# EAGLE board tdr-bad (EAGLE 6.5.0)
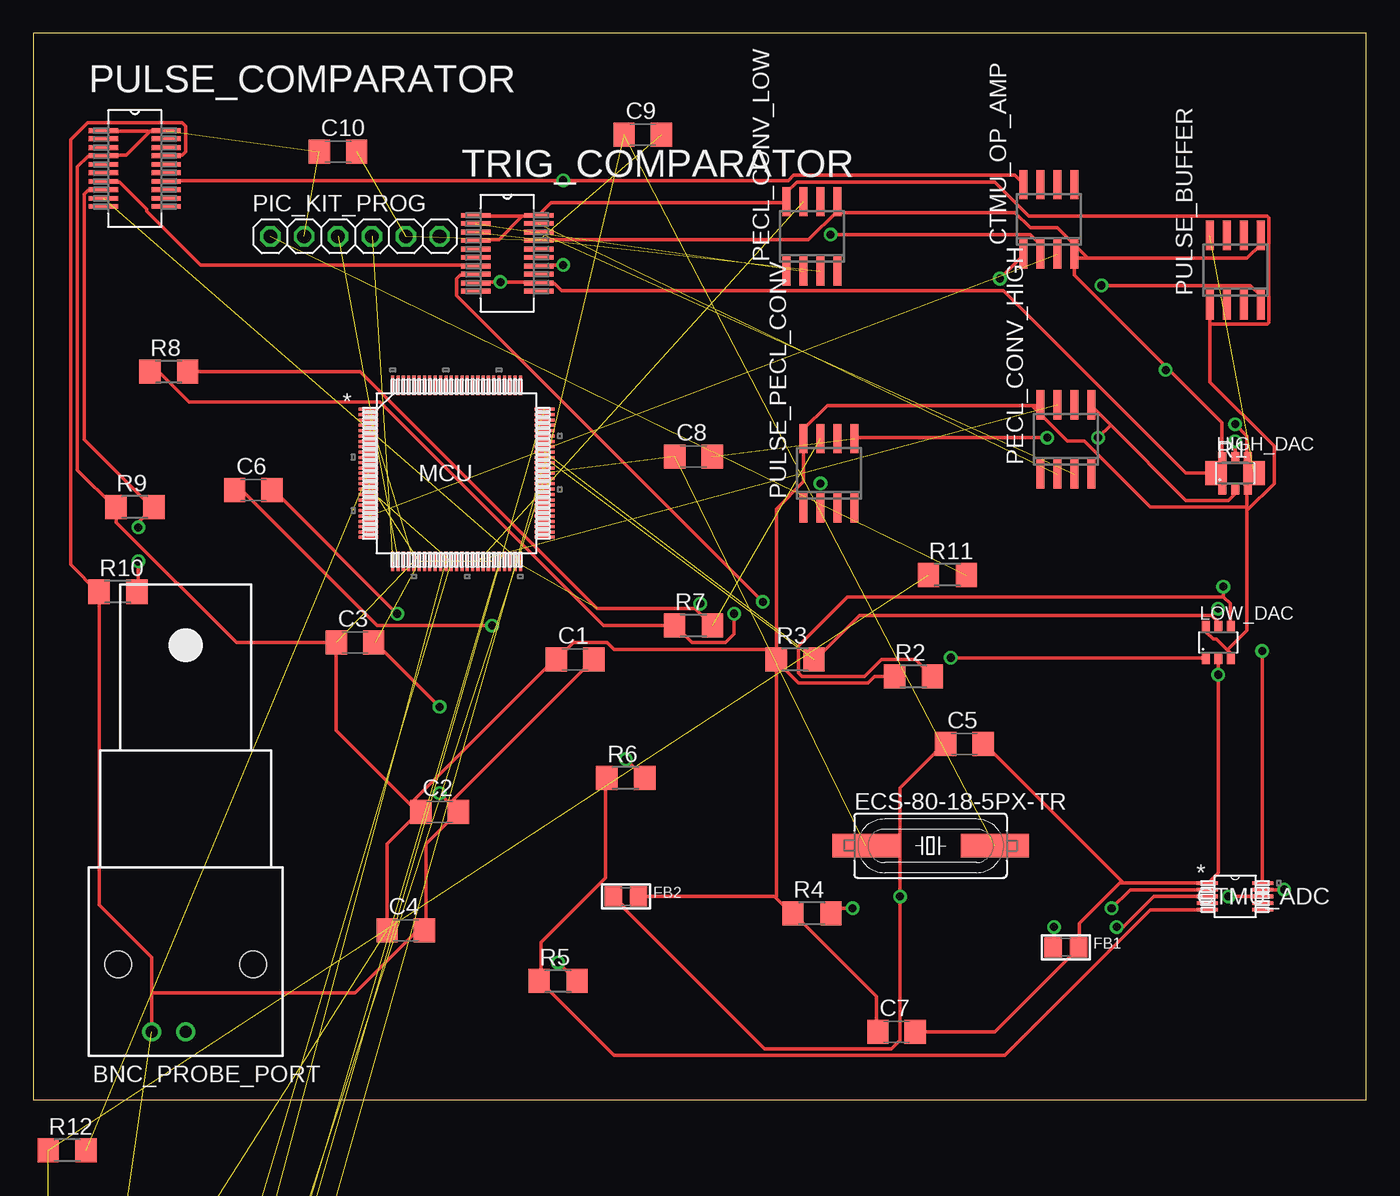
[diagram p0: board, top side]
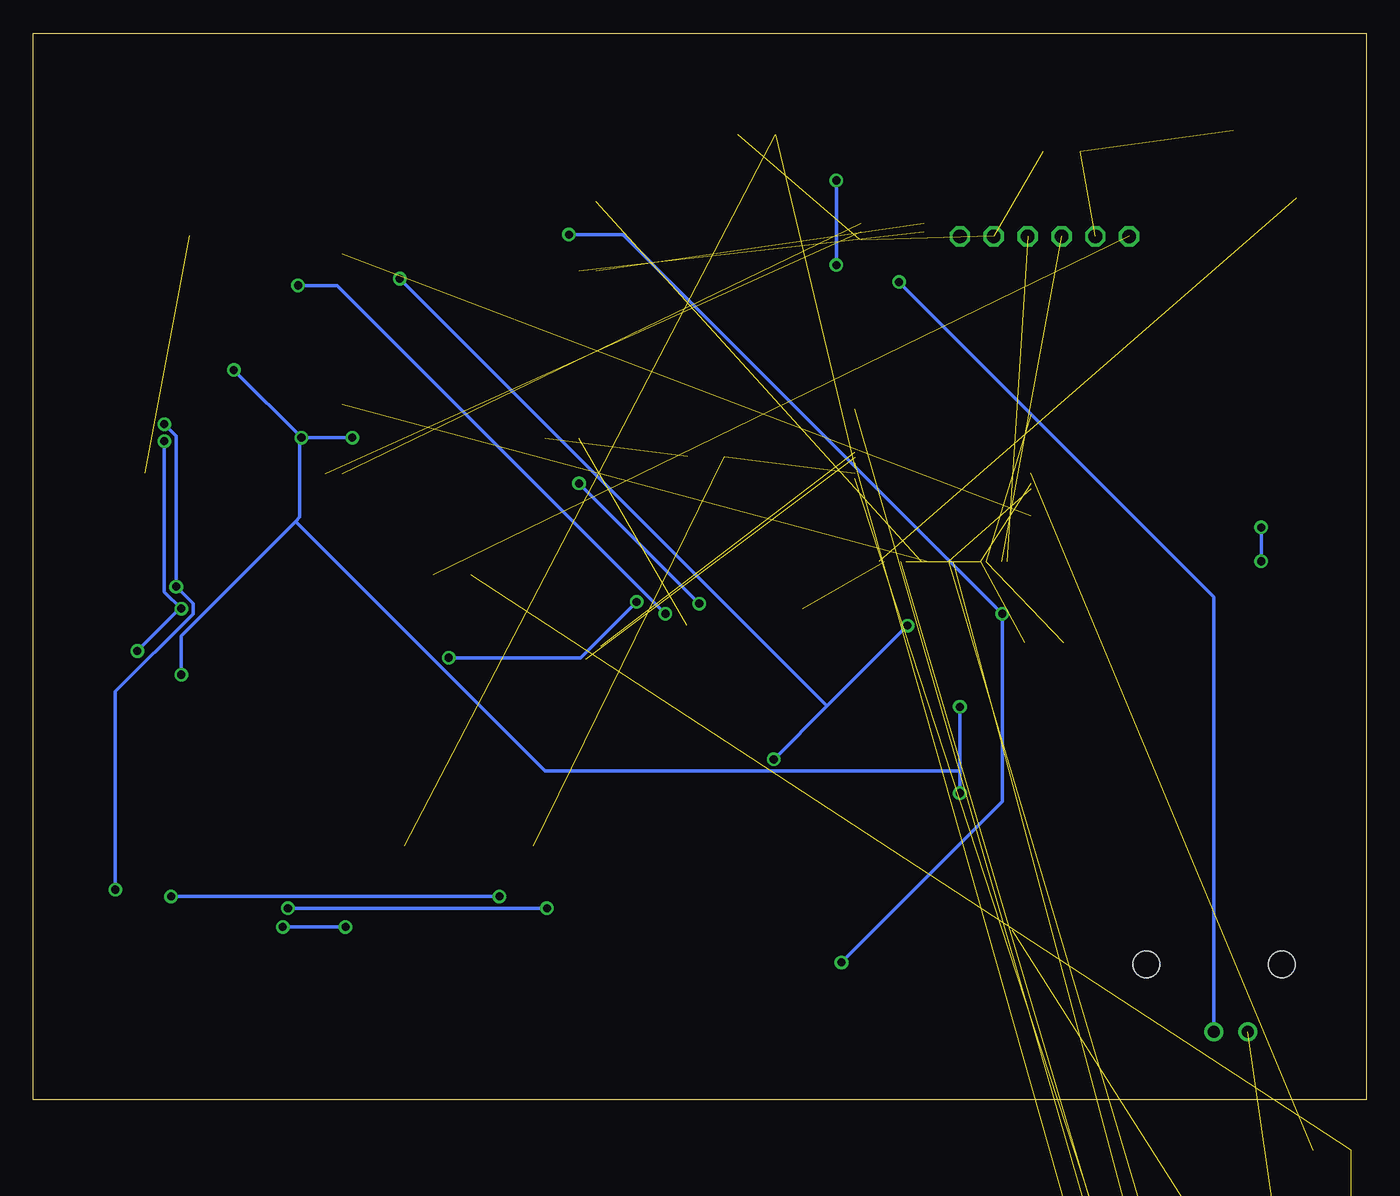
[diagram p1: board, bottom side, seen from below]

Size 100 x 80 mm. Coordinates in mm from the lower left corner, seen from the top.
Outline: 0,0 100,0 100,80 0,80 0,0
Copper layers (1*16): Top 0.035mm / dielectric 1.5mm / Bottom 0.035mm
Design rules "default": minimum track width 10mil, minimum drill 24mil, track to track 8mil, track to pad 8mil, pad to pad 8mil, via to via 8mil, smd to smd 8mil, copper to edge 40mil, drill to drill 8mil, minimum pad ring 10mil, minimum via ring 8mil, stop-mask expansion 4mil, vias tented up to drill 0mil, thermal gap 10mil

## Footprints (pad centres in the part's own frame; a part is rotated, then mirrored left to right if it is on the bottom)
AMP_227161 = drill 0.9 pad 1.27: 1 0,-5.08; 2 -2.54,-5.08 | hole 2: -5.08,0; 5.08,0
C1206 = smd 1.6 x 1.8: 1 -1.4,0; 2 1.4,0
DGS10 = smd 1.575 x 0.279: 1 -2.083,0.991; 2 -2.083,0.508; 3 -2.083,0; 4 -2.083,-0.508; 5 -2.083,-0.991; 6 2.083,-0.991; 7 2.083,-0.508; 8 2.083,0; 9 2.083,0.508; 10 2.083,0.991
SOIC8 = smd 0.6 x 2.2: 1 3.175,1.21; 2 4.445,1.21; 3 5.715,1.21; 4 6.985,1.21; 5 6.985,6.41; 6 5.715,6.41; 7 4.445,6.41; 8 3.175,6.41
SM49 = smd 5.08 x 1.778: 1 -4.826,0; 2 4.826,0
0805 = smd 1.3 x 1.5: 1 -0.95,0; 2 0.95,0
SOT-23-6 = smd 0.6 x 0.9: 1 -0.95,-1.15; 2 0,-1.15; 3 0.95,-1.15; 4 0.95,1.15; 5 0,1.15; 6 -0.95,1.15
TQFP100_12X12MC = smd 1.473 x 0.229: 1 -6.604,4.801; 2 -6.604,4.394; 3 -6.604,3.988; 4 -6.604,3.607; 5 -6.604,3.2; 6 -6.604,2.794; 7 -6.604,2.388; 8 -6.604,2.007; 9 -6.604,1.6; 10 -6.604,1.194; 11 -6.604,0.787; 12 -6.604,0.406; 13 -6.604,0; 14 -6.604,-0.406; 15 -6.604,-0.787; 16 -6.604,-1.194; 17 -6.604,-1.6; 18 -6.604,-2.007; 19 -6.604,-2.388; 20 -6.604,-2.794; 21 -6.604,-3.2; 22 -6.604,-3.607; 23 -6.604,-3.988; 24 -6.604,-4.394; 25 -6.604,-4.801; 51 6.604,-4.801; 52 6.604,-4.394; 53 6.604,-3.988; 54 6.604,-3.607; 55 6.604,-3.2; 56 6.604,-2.794; 57 6.604,-2.388; 58 6.604,-2.007; 59 6.604,-1.6; 60 6.604,-1.194; 61 6.604,-0.787; 62 6.604,-0.406; 63 6.604,0; 64 6.604,0.406; 65 6.604,0.787; 66 6.604,1.194; 67 6.604,1.6; 68 6.604,2.007; 69 6.604,2.388; 70 6.604,2.794; 71 6.604,3.2; 72 6.604,3.607; 73 6.604,3.988; 74 6.604,4.394; 75 6.604,4.801 | smd 0.229 x 1.473: 26 -4.801,-6.604; 27 -4.394,-6.604; 28 -3.988,-6.604; 29 -3.607,-6.604; 30 -3.2,-6.604; 31 -2.794,-6.604; 32 -2.388,-6.604; 33 -2.007,-6.604; 34 -1.6,-6.604; 35 -1.194,-6.604; 36 -0.787,-6.604; 37 -0.406,-6.604; 38 0,-6.604; 39 0.406,-6.604; 40 0.787,-6.604; 41 1.194,-6.604; 42 1.6,-6.604; 43 2.007,-6.604; 44 2.388,-6.604; 45 2.794,-6.604; 46 3.2,-6.604; 47 3.607,-6.604; 48 3.988,-6.604; 49 4.394,-6.604; 50 4.801,-6.604; 76 4.801,6.604; 77 4.394,6.604; 78 3.988,6.604; 79 3.607,6.604; 80 3.2,6.604; 81 2.794,6.604; 82 2.388,6.604; 83 2.007,6.604; 84 1.6,6.604; 85 1.194,6.604; 86 0.787,6.604; 87 0.406,6.604; 88 0,6.604; 89 -0.406,6.604; 90 -0.787,6.604; 91 -1.194,6.604; 92 -1.6,6.604; 93 -2.007,6.604; 94 -2.388,6.604; 95 -2.794,6.604; 96 -3.2,6.604; 97 -3.607,6.604; 98 -3.988,6.604; 99 -4.394,6.604; 100 -4.801,6.604
1X06 = drill 1.016 octagon: 1 -6.35,0; 2 -3.81,0; 3 -1.27,0; 4 1.27,0; 5 3.81,0; 6 6.35,0
SOP635P600X175-20N = smd 2.184 x 0.356: 1 -2.362,2.845; 2 -2.362,2.235; 3 -2.362,1.575; 4 -2.362,0.965; 5 -2.362,0.305; 6 -2.362,-0.305; 7 -2.362,-0.965; 8 -2.362,-1.575; 9 -2.362,-2.235; 10 -2.362,-2.845; 11 2.362,-2.845; 12 2.362,-2.235; 13 2.362,-1.575; 14 2.362,-0.965; 15 2.362,-0.305; 16 2.362,0.305; 17 2.362,0.965; 18 2.362,1.575; 19 2.362,2.235; 20 2.362,2.845
R1206 = smd 1.6 x 1.803: 1 -1.422,0; 2 1.422,0

## Placement (x,y rotation side)
BNC_PROBE_PORT  1-227161-6  [AMP_227161]  11.43,10.16 0 top
C1  .1uF  [C1206]  40.64,33.02 0 top
C2  10uF TA  [C1206]  30.48,21.59 0 top
C3  .1uF  [C1206]  24.13,34.29 0 top
C4  10uF TA  [C1206]  27.94,12.7 0 top
C5  1uF  [C1206]  69.85,26.67 0 top
C6  1uF  [C1206]  16.51,45.72 0 top
C7  1uF  [C1206]  64.77,5.08 0 top
C8  27pF  [C1206]  49.53,48.26 0 top
C9  27pF  [C1206]  45.72,72.39 0 top
C10  27pF  [C1206]  22.86,71.12 0 top
C11  .1uF  [C1206]  2.54,-16.51 0 top  (outside the outline)
C12  10uF  [C1206]  2.54,-29.21 0 top  (outside the outline)
C13  10uF  [C1206]  2.54,-35.56 0 top  (outside the outline)
C14  10uF  [C1206]  2.54,-67.31 0 top  (outside the outline)
C15  10uF  [C1206]  2.54,-73.66 0 top  (outside the outline)
C16  10uF  [C1206]  2.54,-80.01 0 top  (outside the outline)
C17  10uF  [C1206]  2.54,-60.96 0 top  (outside the outline)
CTMU_ADC  ADS1115_DGS_10  [DGS10]  90.17,15.24 0 top
CTMU_OP_AMP  LMC662  [SOIC8]  71.12,62.23 0 top
ECS-80-18-5PX-TR  8mhz / 20pf  [SM49]  67.31,19.05 0 top
FB1  MMZ2012Y152B  [0805]  77.47,11.43 0 top
FB2  MMZ2012Y152B  [0805]  44.45,15.24 0 top
HIGH_DAC  MCP4725  [SOT-23-6]  90.17,46.99 0 top
LOW_DAC  MCP4725  [SOT-23-6]  88.9,34.29 0 top
MCU  PIC24FJXXXDAX10-X/PT  [TQFP100_12X12MC]  31.75,46.99 0 top
PECL_CONV_HIGH  MC100EPT21  [SOIC8]  72.39,45.72 0 top
PECL_CONV_LOW  MC100EPT21  [SOIC8]  53.34,60.96 0 top
PIC_KIT_PROG  [1X06]  24.13,64.77 0 top
PULSE_BUFFER  LMH6559  [SOIC8]  85.09,58.42 0 top
PULSE_COMPARATOR  ADCMP562BRQZ  [SOP635P600X175-20N]  7.62,69.85 0 top
PULSE_PECL_CONV  MC100EPT21  [SOIC8]  54.61,43.18 0 top
R1  50 ohm  [R1206]  90.17,46.99 0 top
R2  4.7k  [R1206]  66.04,31.75 0 top
R3  4.7k  [R1206]  57.15,33.02 0 top
R4  10k  [R1206]  58.42,13.97 0 top
R5  4.7k  [R1206]  39.37,8.89 0 top
R6  100 ohm  [R1206]  44.45,24.13 0 top
R7  0 ohm (PECL/COMP pulse select)  [R1206]  49.53,35.56 0 top
R8  0 ohm (MCU pulse select)  [R1206]  10.16,54.61 0 top
R9  10k  [R1206]  7.62,44.45 0 top
R10  10k  [R1206]  6.35,38.1 0 top
R11  100 ohm  [R1206]  68.58,39.37 0 top
R12  100 ohm  [R1206]  2.54,-3.81 0 top  (outside the outline)
R13  100 ohm  [R1206]  2.54,-22.86 0 top  (outside the outline)
TRIG_COMPARATOR  ADCMP562BRQZ  [SOP635P600X175-20N]  35.56,63.5 0 top

## Library data of the parts
BNC_PROBE_PORT = con-coax; MF: TYCO ELECTRONICS; MPN: 1-227161-6; OC_FARNELL: unknown; OC_NEWARK: 09H7854
C1-C17 R1-R13 = resistor
CTMU_ADC = ads1115; DATASHEETURL: http://www.ti.com/lit/gpn/ADS1115; DESCRIPTION: 16-Bit ADC with Integrated MUX, PGA, Comparator, Oscillator, and Reference; FAMILY_NAME: PRECISION ADC (<=10MSPS); GENERIC_PART_NUMBER: ADS1115; INDUSTRY_STD_PKG_TYPE: MSOP; MANUFACTURER: Texas Instruments; PACKAGE_DESIGNATOR: DGS; PIN_COUNT: 10
CTMU_OP_AMP HIGH_DAC LOW_DAC PECL_CONV_HIGH PECL_CONV_LOW PULSE_BUFFER PULSE_PECL_CONV = eagle_parts
ECS-80-18-5PX-TR = adafruit; OC_FARNELL: unknown; OC_NEWARK: unknown
FB1 FB2 = microbuilder
MCU = pic24f
PIC_KIT_PROG = adafruit
PULSE_COMPARATOR TRIG_COMPARATOR = ADI-Phase-2; MPN: ADCMP562BRQZ; OC_FARNELL: unknown; OC_NEWARK: 12M7641; PACKAGE: QSOP-20; SUPPLIER: Analog Devices

## Nets
+3V3: C1.1 C2.1 C3.1 C4.1 C7.1 C10.1 C12.1 C13.1 FB2.2 HIGH_DAC.3 LOW_DAC.3 LOW_DAC.6 MCU.2 MCU.30 PECL_CONV_HIGH.8 PECL_CONV_LOW.8 PIC_KIT_PROG.2 PULSE_BUFFER.1 PULSE_COMPARATOR.1 PULSE_COMPARATOR.4 PULSE_COMPARATOR.20 PULSE_PECL_CONV.8 R2.1 R3.1 R4.1 R9.1 R13.2 TRIG_COMPARATOR.1 TRIG_COMPARATOR.4 TRIG_COMPARATOR.20
+5V: CTMU_OP_AMP.8 PULSE_COMPARATOR.14 TRIG_COMPARATOR.14
-5V: PULSE_COMPARATOR.7 TRIG_COMPARATOR.7
ADC1: CTMU_ADC.5 R5.1 R6.1
CTMU_EDGE1: MCU.42 PECL_CONV_LOW.7
CTMU_EDGE2: MCU.41 PECL_CONV_HIGH.7
GND: BNC_PROBE_PORT.2 C1.2 C2.2 C3.2 C4.2 C5.2 C7.2 C8.2 C9.2 C10.2 C12.2 C13.2 C16.2 CTMU_ADC.1 CTMU_OP_AMP.4 FB1.2 HIGH_DAC.2 HIGH_DAC.6 LOW_DAC.2 MCU.15 MCU.31 MCU.45 PECL_CONV_HIGH.5 PECL_CONV_LOW.5 PIC_KIT_PROG.5 PULSE_BUFFER.5 PULSE_COMPARATOR.17 PULSE_PECL_CONV.5 R10.1 TRIG_COMPARATOR.17
HIGH_ADC_OUT: HIGH_DAC.1
HIGH_DAC_OUT: TRIG_COMPARATOR.13
I2C_SCL: CTMU_ADC.10 HIGH_DAC.5 LOW_DAC.5 MCU.66 R3.2
I2C_SDA: CTMU_ADC.9 HIGH_DAC.4 LOW_DAC.4 MCU.67 R2.2
LOW_DAC_OUT: LOW_DAC.1 TRIG_COMPARATOR.8
MCLR: MCU.13 R12.2
MCU_PULSE_OUT: MCU.49 R8.2
N$1: PULSE_BUFFER.4 R7.1 R8.1
N$2: CTMU_ADC.2 R4.2
N$3: CTMU_ADC.3 FB1.1
N$4: C5.1 CTMU_ADC.8 FB2.1
N$5: CTMU_OP_AMP.3 MCU.21
N$6: C6.1 CTMU_OP_AMP.1 R6.2
N$7: C6.2 CTMU_OP_AMP.2 R5.2
N$8: PULSE_COMPARATOR.8 R9.2 R10.2
N$9: PECL_CONV_LOW.3 TRIG_COMPARATOR.3
N$10: PECL_CONV_LOW.2 TRIG_COMPARATOR.2
N$11: PULSE_PECL_CONV.7 R7.2
N$12: PULSE_BUFFER.8 R1.2
N$13: PULSE_COMPARATOR.3
N$14: PULSE_COMPARATOR.2
N$15: C9.1 ECS-80-18-5PX-TR.2 MCU.64
N$16: C8.1 ECS-80-18-5PX-TR.1 MCU.63
N$17: PIC_KIT_PROG.1 R11.2
PULSE_OUT_FOR_COMP: MCU.50 PULSE_COMPARATOR.9
T_COMP_OUTB1: PECL_CONV_HIGH.2 TRIG_COMPARATOR.19
T_COMP_OUTB2: PECL_CONV_HIGH.3 TRIG_COMPARATOR.18
TARGET_CLOCK: MCU.26 PIC_KIT_PROG.4
TARGET_DATA: MCU.27 PIC_KIT_PROG.3
TARGET_MCLR: C11.1 R11.1 R12.1 R13.1
TRIGGER: BNC_PROBE_PORT.1 R1.1 TRIG_COMPARATOR.9 TRIG_COMPARATOR.12
VCAP: MCU.85
VDD: C14.1 MCU.62
VDD_3: C16.1 C17.1 MCU.16 MCU.37
VDD_5: C15.1 MCU.46
VSS: C14.2 MCU.75
VSS_3: C17.2 MCU.36
VSS_5: C15.2 MCU.65
VUSB: MCU.55

## Tracks (layer width: path | path; a pad name or v marks a point on that pad's centre or on a via)
+3V3  (7 unrouted)
  Top 0.254: 36.64,66.23 36.7,66.29 37.85,66.29 TRIG_COMPARATOR.20 37.97,66.42 38.86,67.31 56.52,67.31 PECL_CONV_LOW.8 56.52,68.07 57.28,68.83 72.14,68.83 74.68,66.29 92.58,66.29 92.71,66.17 92.71,58.29 92.58,58.17 88.27,58.17 | 36.64,66.23 34.92,64.52 33.27,64.52 TRIG_COMPARATOR.4 | TRIG_COMPARATOR.1 33.27,66.29 36.58,66.29 36.64,66.23 | 89.6,33.72 88.77,34.54 88.52,34.54 88.01,35.05 88.01,35.43 LOW_DAC.6 | 89.6,33.72 89.79,33.53 89.79,33.15 LOW_DAC.3 | 91.06,44.2 91.06,35.18 89.6,33.72 | 91.06,44.2 91.06,44.45 | 91.06,44.45 91.06,45.72 HIGH_DAC.3 | 88.27,58.17 88.27,53.85 93.09,49.02 93.09,46.23 91.06,44.2 | 88.27,58.17 PULSE_BUFFER.1 | FB2.2 55.63,15.24 55.69,15.18 | 55.69,15.18 56.9,13.97 R4.1 57.02,13.97 63.25,7.75 63.25,5.08 C7.1 | R2.1 63.12,31.75 62.61,31.24 57.4,31.24 55.63,33.02 R3.1 | 55.75,33.78 55.75,33.02 R3.1 | 55.75,33.78 55.75,44.32 57.78,46.35 PULSE_PECL_CONV.8 57.78,50.29 59.56,52.07 74.93,52.07 | 74.93,52.07 75.56,52.07 PECL_CONV_HIGH.8 | 55.69,15.18 55.75,15.24 55.75,32.77 R3.1 | 8.7,72.58 8.76,72.64 9.91,72.64 PULSE_COMPARATOR.20 | 8.7,72.58 6.99,70.87 5.33,70.87 PULSE_COMPARATOR.4 5.21,70.74 4.06,70.74 3.3,69.98 3.3,47.24 6.1,44.45 R9.1 6.22,44.45 6.22,43.31 15.24,34.29 C3.1 22.73,27.69 28.83,21.59 C2.1 | PULSE_COMPARATOR.1 5.33,72.64 8.64,72.64 8.7,72.58 | C4.1 26.54,19.18 28.96,21.59 C2.1 | C2.1 28.32,22.23 39.12,33.02 C1.1 40.51,34.29 43.05,34.29 43.56,33.78 55.75,33.78 | 55.75,33.78 R3.1 | 91.06,44.45 83.82,44.45 78.87,49.4 77.6,49.4 74.93,52.07
+5V  (via drill 0.61)
  Top 0.254: PULSE_COMPARATOR.14 10.03,68.96 v39.75,68.96 56.64,68.96 57.02,69.34 73.66,69.34 74.3,68.71 CTMU_OP_AMP.8 | v39.75,62.61 37.97,62.61 TRIG_COMPARATOR.14
  Bottom 0.254: v39.75,68.96 v39.75,62.61
-5V
  Top 0.254: PULSE_COMPARATOR.7 5.33,68.83 6.48,68.83 8.51,66.8 8.51,66.67 12.57,62.61 33.15,62.61 TRIG_COMPARATOR.7
ADC1
  Top 0.254: CTMU_ADC.5 88.01,14.22 83.82,14.22 72.9,3.3 43.56,3.3 37.97,8.89 R5.1 38.1,8.89 38.1,11.81 42.93,16.64 42.93,24.13 R6.1
CTMU_EDGE1  (1 unrouted)
CTMU_EDGE2  (1 unrouted)
GND  (via drill 0.61)  (10 unrouted)
  Top 0.254: C2.2 29.46,19.18 29.46,12.7 C4.2 28.83,12.7 24.13,8 8.89,8 | v30.48,29.46 25.65,34.29 C3.2 | C2.2 31.24,22.23 | 31.24,22.23 v30.48,22.99 | C2.2 31.24,22.23 | 31.24,22.23 C1.2 | BNC_PROBE_PORT.2 8.89,8 | 8.89,8 8.89,10.67 4.95,14.61 4.95,38.1 R10.1 4.83,38.1 2.79,40.13 2.79,72.01 4.06,73.28 11.18,73.28 11.43,73.03 11.43,71.12 11.18,70.87 10.03,70.87 PULSE_COMPARATOR.17 | LOW_DAC.2 v88.9,31.88 88.9,17.02 88.14,16.26 CTMU_ADC.1 88.01,16.26 81.79,16.26 | 78.49,11.43 78.49,13.21 81.53,16.26 81.79,16.26 | C7.2 72.14,5.08 78.49,11.43 | 78.49,11.43 FB1.2 | 81.79,16.26 71.37,26.67 C5.2 | HIGH_DAC.2 90.17,45.47 89.66,44.96 86.49,44.96 80.83,50.61 | 80.83,50.61 79.38,52.07 PECL_CONV_HIGH.5 | v76.07,49.66 61.59,49.66 PULSE_PECL_CONV.5 | 80.83,50.61 v79.88,49.66 | TRIG_COMPARATOR.17 37.97,64.52 58.17,64.52 60.33,66.67 PECL_CONV_LOW.5 60.33,66.55 73.66,66.55 74.8,65.41 76.83,65.41 79.12,63.12 | 85.03,54.93 78.11,61.85 78.11,63.12 | 85.03,54.93 89.15,50.8 89.15,48.26 HIGH_DAC.6 | 78.11,63.12 CTMU_OP_AMP.4 78.11,63.37 | PULSE_BUFFER.5 92.08,64.14 91.06,63.12 79.12,63.12 | 78.11,63.12 79.12,63.12 | v84.96,54.74 84.96,54.86 85.03,54.93
  Bottom 0.254: v30.48,22.99 30.48,24.64 | 30.48,24.64 v30.48,29.46 | v79.88,49.66 v76.07,49.66 | v84.96,54.74 v79.88,49.66 | v88.9,31.88 88.9,34.8 80.33,43.37 | 80.33,43.37 80.01,43.69 80.01,49.66 v79.88,49.66 | 30.48,24.64 61.59,24.64 80.33,43.37
I2C_SCL  (via drill 0.61)  (1 unrouted)
  Top 0.254: LOW_DAC.5 88.9,35.81 88.39,36.32 | 88.39,36.32 61.98,36.32 58.67,33.02 R3.2 | v90.17,49.4 HIGH_DAC.5 | 88.39,36.32 v88.9,36.83 | v92.2,33.66 92.2,16.26 CTMU_ADC.10
  Bottom 0.254: v90.17,49.4 90.17,38.1 v88.9,36.83 89.03,36.83 v92.2,33.66
I2C_SDA  (via drill 0.61)  (1 unrouted)
  Top 0.254: 89.28,37.72 89.79,37.21 89.79,35.56 LOW_DAC.4 | 89.28,37.72 61.09,37.72 57.4,34.04 57.4,32 57.66,31.75 62.36,31.75 63.63,33.02 66.17,33.02 67.44,31.75 R2.2 | v90.17,50.67 91.06,49.78 91.06,48.26 HIGH_DAC.4 | 89.28,37.72 v89.28,38.48 | v93.85,15.75 CTMU_ADC.9
  Bottom 0.254: v90.17,50.67 89.28,49.78 v89.28,38.48 88.01,37.21 88.01,36.45 93.85,30.61 v93.85,15.75
LOW_DAC_OUT  (via drill 0.61)
  Top 0.254: v68.83,33.15 87.88,33.15 LOW_DAC.1 | v54.74,37.34 31.75,60.33 31.75,61.59 32,61.85 33.15,61.85 TRIG_COMPARATOR.8
  Bottom 0.254: v68.83,33.15 58.93,33.15 v54.74,37.34
MCLR  (1 unrouted)
MCU_PULSE_OUT  (via drill 0.61)  (1 unrouted)
  Top 0.254: R8.2 24.51,54.61 42.29,36.83 49.66,36.83 | 50.93,35.56 49.66,36.83 | 49.66,36.83 v50.04,37.21
  Bottom 0.254: v50.04,37.21 v59.05,46.23
N$1  (via drill 0.61)
  Top 0.254: R8.1 9.4,54.61 11.68,52.32 26.04,52.32 42.8,35.56 R7.1 48.13,35.56 49.4,34.29 51.94,34.29 52.58,34.92 v52.58,36.45 | PULSE_BUFFER.4 92.08,60.33 91.31,61.09 v80.14,61.09
  Bottom 0.254: v80.14,61.09 77.22,61.09 v52.58,36.45
N$2  (via drill 0.61)
  Top 0.254: CTMU_ADC.2 82.3,15.75 v80.9,14.35 | v61.47,14.35 60.33,14.35 59.94,13.97 R4.2
  Bottom 0.254: v61.47,14.35 v80.9,14.35
N$3  (via drill 0.61)
  Top 0.254: v76.58,12.95 76.58,11.43 FB1.1 | v81.28,12.95 81.79,12.95 84.07,15.24 CTMU_ADC.3 88.14,15.24
  Bottom 0.254: v81.28,12.95 v76.58,12.95
N$4  (via drill 0.61)
  Top 0.254: FB2.1 43.56,15.24 44.32,14.48 44.32,14.35 54.86,3.81 64.39,3.81 65.02,4.45 v65.02,15.24 65.02,23.37 68.33,26.67 C5.1 | v89.66,15.24 CTMU_ADC.8
  Bottom 0.254: v65.02,15.24 v89.66,15.24
N$5  (1 unrouted)
N$6  (via drill 0.61)
  Top 0.254: C6.1 15.62,45.72 25.78,35.56 v34.42,35.56 | v44.45,25.53 45.85,24.13 R6.2 | v72.52,61.59 74.3,63.37 CTMU_OP_AMP.1
  Bottom 0.254: v44.45,25.53 40.45,29.53 | 40.45,29.53 v34.42,35.56 | 40.45,29.53 v72.52,61.59
N$7  (via drill 0.61)
  Top 0.254: v27.3,36.45 18.03,45.72 C6.2 | v39.37,10.29 40.77,8.89 R5.2 | CTMU_OP_AMP.2 75.56,64.14 74.8,64.9 v59.82,64.9
  Bottom 0.254: v39.37,10.29 27.3,22.35 v27.3,36.45 55.75,64.9 v59.82,64.9
N$8  (via drill 0.61)
  Top 0.254: v7.87,40.39 7.87,38.1 R10.2 | v7.87,42.93 7.87,43.31 9.02,44.45 R9.2 8.89,44.45 3.81,49.53 3.81,67.94 4.06,68.2 5.21,68.2 PULSE_COMPARATOR.8
  Bottom 0.254: v7.87,42.93 v7.87,40.39
N$9  (1 unrouted)
N$10  (1 unrouted)
N$11  (1 unrouted)
N$12  (1 unrouted)
N$15  (2 unrouted)
N$16  (2 unrouted)
N$17  (1 unrouted)
PULSE_OUT_FOR_COMP  (1 unrouted)
T_COMP_OUTB1  (1 unrouted)
T_COMP_OUTB2  (1 unrouted)
TARGET_CLOCK  (1 unrouted)
TARGET_DATA  (1 unrouted)
TARGET_MCLR  (3 unrouted)
TRIGGER  (via drill 0.61)
  Top 0.254: R1.1 86.49,46.99 72.77,60.71 39.62,60.71 39.12,61.21 37.97,61.21 TRIG_COMPARATOR.12 37.85,61.34 v35.05,61.34 33.27,61.34 TRIG_COMPARATOR.9
  Bottom 0.254: BNC_PROBE_PORT.1 11.43,37.72 v35.05,61.34
VDD  (1 unrouted)
VDD_3  (3 unrouted)
VDD_5  (1 unrouted)
VSS  (1 unrouted)
VSS_3  (1 unrouted)
VSS_5  (1 unrouted)